# Altium PCB PCB.PcbDoc (part 2 of 2)
Units mm, origin at the board's own origin, x right, y up, seen from the top; angles counter-clockwise.
Board outline 23.1 x 50.44 mm, 2 copper layers (Top Layer, Bottom Layer), stack 1.671 mm thick; 126 components, 44 nets, 357 pads, 87 vias.
Unrouted connection lines stored in the file: 3.
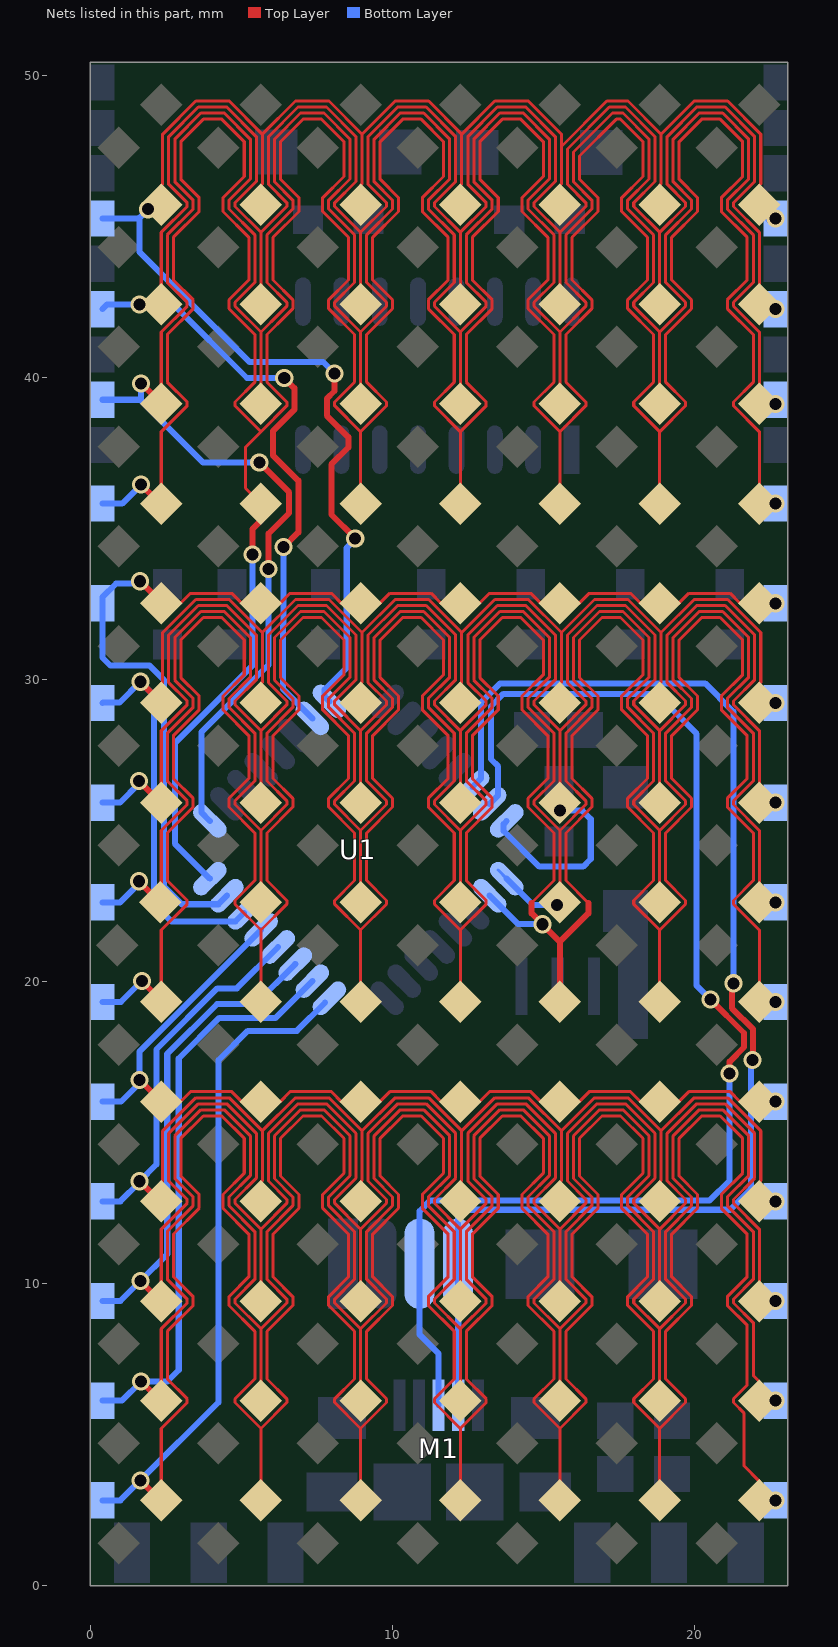
[diagram p2: the nets of this part, all layers, seen from the top]

## Via types
v1: diameter 0.6, hole 0.4, Top Layer to Bottom Layer, tented both sides, 86 vias
v2: diameter 0.6, hole 0.4, Top Layer to Bottom Layer, tented top, 1 vias

## Nets (pads, with @x,y where several pads share a name; then routed paths per layer and width w, separated by ;. In a path a pad name is that pad's centre, name@x,y a point inside that pad or via, vN(x,y) a via of type N, cw(c..) or ccw(c..) an arc to the next point about the centre after c; other vN are vias at no path point) (continued)
R2: D8.2 D9.2 D10.2 D11.2 D12.2 D13.2 D14.2 pad.@0.405,45.267 pad.@22.693,45.267 U1.24 | length 70.6
  Top Layer w0.1: D8.2@2.356,45.728 2.356,45.901 2.356,46.365 2.403,46.412 2.403,48.062 3.499,49.157 4.607,49.157 5.703,48.062 ; D9.2@5.656,45.728 5.656,46.365 5.703,46.412 ; D10.2@8.956,45.728 8.956,46.365 9.003,46.412 ; D11.2@12.256,45.728 12.256,46.365 12.303,46.412 ; D12.2@15.556,45.728 15.556,46.365 15.603,46.412 15.603,47.653 ; D13.2@18.856,45.728 18.856,46.365 18.903,46.412 18.903,48.062 ; D14.2@22.156,45.728 22.156,46.365 22.203,46.412 22.203,48.062 21.107,49.157 19.999,49.157 18.903,48.062 ; 5.703,46.412 5.703,48.062 ; 5.703,46.412 5.703,48.062 ; 5.703,48.062 6.799,49.157 7.907,49.157 9.003,48.062 ; 9.003,46.412 9.003,48.062 ; 9.003,46.412 9.003,48.062 ; 9.003,48.062 10.099,49.157 11.207,49.157 12.303,48.062 ; 12.303,46.412 12.303,48.062 ; 12.303,46.412 12.303,48.062 ; 12.303,48.062 13.399,49.157 14.507,49.157 15.603,48.062 15.603,47.653 ; 15.603,47.653 17.108,49.157 17.807,49.157 18.903,48.062
  Top Layer w0.2: v1(1.919,45.576) 1.919,45.601 2.218,45.901 D8.2@2.356,45.901 ; v1(8.091,40.14) 8.091,39.556 7.837,39.302 7.837,38.743 8.548,38.032 8.548,37.685 7.989,37.126 7.989,35.467 v1(8.777,34.679)
  Bottom Layer w0.2: pad.@0.405,45.267 1.61,45.267 1.639,45.297 ; v1(1.919,45.576) 1.639,45.297 ; U1.24@7.924,29.281 7.766,29.439 7.766,29.668 8.497,30.399 8.497,34.362 8.777,34.642 v1(8.777,34.679) ; v1(8.091,40.14) 7.71,40.521 5.271,40.521 1.639,44.154 1.639,45.297
  Bottom Layer w0.3: pad.@22.493,45.267 pad.@22.493,45.271
  other v1: 22.693,45.267
R3: D15.2 D16.2 D17.2 D18.2 D19.2 D20.2 D21.2 pad.@0.405,42.267 pad.@22.693,42.267 U1.23 | length 104.7
  Top Layer w0.1: D15.2@2.356,42.428 2.356,44.809 3.213,45.666 3.213,45.791 2.603,46.4 2.603,47.979 3.582,48.957 4.525,48.957 5.503,47.979 5.503,46.495 4.799,45.791 4.799,45.666 5.656,44.809 ; D16.2@5.656,42.428 5.656,44.809 ; D17.2@8.956,42.428 8.956,44.809 ; D18.2@12.256,42.428 12.256,44.809 ; D19.2@15.556,42.428 15.556,44.809 ; D20.2@18.856,42.428 18.856,44.809 ; D21.2@22.156,42.428 22.156,44.809 21.299,45.666 21.299,45.791 22.003,46.495 22.003,47.979 21.025,48.957 20.082,48.957 19.103,47.979 19.103,46.4 19.713,45.791 19.713,45.666 18.856,44.809 ; 5.656,44.809 6.513,45.666 6.513,45.791 5.903,46.4 5.903,47.979 6.882,48.957 7.825,48.957 8.803,47.979 8.803,46.495 8.099,45.791 8.099,45.666 8.956,44.809 ; 8.956,44.809 9.813,45.666 9.813,45.791 9.203,46.4 9.203,47.979 10.182,48.957 11.125,48.957 12.103,47.979 12.103,46.495 11.399,45.791 11.399,45.666 12.256,44.809 ; 12.256,44.809 13.113,45.666 13.113,45.791 12.503,46.4 12.503,47.979 13.482,48.957 14.425,48.957 15.403,47.979 15.403,46.495 14.699,45.791 14.699,45.666 15.556,44.809 ; 15.556,44.809 16.413,45.666 16.413,45.791 15.803,46.4 15.803,47.57 17.191,48.957 17.725,48.957 18.703,47.979 18.703,46.495 17.999,45.791 17.999,45.666 18.856,44.809
  Top Layer w0.2: v1(1.639,42.426) 2.354,42.426 D15.2@2.356,42.428 ; v1(6.406,34.392) 6.892,34.878 6.892,36.585 6.059,37.419 6.059,38.235 6.763,38.939 6.763,39.652 v1(6.427,39.988)
  Bottom Layer w0.2: pad.@0.405,42.267 0.564,42.426 v1(1.639,42.426) 2.757,42.426 5.196,39.988 v1(6.427,39.988) ; v1(6.406,34.392) 6.406,31.795 6.38,31.769 6.38,29.693 U1.23@7.358,28.716
  other v1: 22.693,42.267
R4: D22.2 D23.2 D24.2 D25.2 D26.2 D27.2 D28.2 pad.@0.405,39.267 pad.@22.693,39.267 U1.17 | length 148.6
  Top Layer w0.1: D22.2@2.356,39.145 2.356,41.509 3.213,42.366 3.213,42.491 2.556,43.148 2.556,44.726 3.413,45.583 3.413,45.873 2.803,46.483 2.803,47.896 3.665,48.757 4.442,48.757 5.303,47.896 5.303,46.578 4.599,45.873 4.599,45.583 5.456,44.726 5.456,43.148 4.799,42.491 4.799,42.366 5.656,41.509 ; D23.2@5.656,39.128 5.656,41.509 ; D24.2@8.956,39.128 8.956,41.509 ; D25.2@12.256,39.128 12.256,41.509 ; D26.2@15.556,39.128 15.556,41.509 ; D27.2@18.856,39.128 18.856,41.509 ; D28.2@22.156,39.128 22.156,41.509 21.299,42.366 21.299,42.491 21.956,43.148 21.956,44.726 21.099,45.583 21.099,45.873 21.803,46.578 21.803,47.896 20.942,48.757 20.165,48.757 19.303,47.896 19.303,46.483 19.913,45.873 19.913,45.583 19.056,44.726 19.056,43.148 19.713,42.491 19.713,42.366 18.856,41.509 ; 5.656,41.509 6.295,42.148 6.513,42.366 6.513,42.491 5.856,43.148 5.856,44.726 6.713,45.583 6.713,45.873 6.103,46.483 6.103,47.896 6.965,48.757 7.742,48.757 8.603,47.896 8.603,46.578 7.899,45.873 7.899,45.583 8.756,44.726 8.756,43.148 8.099,42.491 8.099,42.366 8.956,41.509 ; 8.956,41.509 9.813,42.366 9.813,42.491 9.156,43.148 9.156,44.726 10.013,45.583 10.013,45.873 9.403,46.483 9.403,47.896 10.265,48.757 11.042,48.757 11.903,47.896 11.903,46.578 11.199,45.873 11.199,45.583 12.056,44.726 12.056,43.148 11.399,42.491 11.399,42.366 12.256,41.509 ; 12.256,41.509 13.113,42.366 13.113,42.491 12.456,43.148 12.456,44.726 13.313,45.583 13.313,45.873 12.703,46.483 12.703,47.896 13.565,48.757 14.342,48.757 15.203,47.896 15.203,46.578 14.499,45.873 14.499,45.583 15.356,44.726 15.356,43.148 14.699,42.491 14.699,42.366 15.556,41.509 ; 15.556,41.509 16.413,42.366 16.413,42.491 15.756,43.148 15.756,44.726 16.613,45.583 16.613,45.873 16.003,46.483 16.003,47.469 17.292,48.757 17.642,48.757 18.503,47.896 18.503,46.578 17.799,45.873 17.799,45.583 18.656,44.726 18.656,43.148 17.999,42.491 17.999,42.366 18.856,41.509
  Top Layer w0.2: v1(1.69,39.81) 2.356,39.145 D22.2@2.356,39.128 ; v1(5.602,37.194) 6.592,36.203 6.592,35.518 5.906,34.832 v1(5.906,33.663)
  Bottom Layer w0.2: pad.@0.405,39.267 1.661,39.267 1.69,39.238 ; v1(1.69,39.81) 1.69,39.238 ; U1.17@3.964,25.322 3.681,25.605 3.681,28.263 5.906,30.488 v1(5.906,33.663) ; v1(5.602,37.194) 3.734,37.194 1.69,39.238
  other v1: 22.693,39.128
R5: D29.2 D30.2 D31.2 D32.2 D33.2 D34.2 D35.2 pad.@0.405,35.828 pad.@22.693,35.828 U1.16 | length 187.5
  Top Layer w0.1: D29.2@2.356,35.828 2.356,38.209 3.213,39.066 3.213,39.191 2.556,39.848 2.556,41.426 3.413,42.283 3.413,42.573 2.756,43.231 2.756,44.644 3.613,45.501 3.613,45.956 3.003,46.566 3.003,47.813 3.748,48.557 4.359,48.557 5.103,47.813 5.103,46.661 4.399,45.956 4.399,45.501 5.256,44.644 5.256,43.231 4.599,42.573 4.599,42.283 5.456,41.426 5.456,39.848 4.799,39.191 4.799,39.066 5.656,38.209 ; D30.2@5.656,35.828 5.144,36.34 5.144,37.698 5.656,38.209 ; D31.2@8.956,35.828 8.956,38.209 ; D32.2@12.256,35.828 12.256,38.209 ; D33.2@15.556,35.828 15.556,38.209 ; D34.2@18.856,35.828 18.856,38.209 ; D35.2@22.156,35.828 22.156,38.209 21.299,39.066 21.299,39.191 21.956,39.848 21.956,41.426 21.099,42.283 21.099,42.573 21.756,43.231 21.756,44.644 20.899,45.501 20.899,45.956 21.603,46.661 21.603,47.813 20.859,48.557 20.248,48.557 19.503,47.813 19.503,46.566 20.113,45.956 20.113,45.501 19.256,44.644 19.256,43.231 19.913,42.573 19.913,42.283 19.056,41.426 19.056,39.848 19.713,39.191 19.713,39.066 18.856,38.209 ; 5.656,38.209 6.513,39.066 6.513,39.191 5.856,39.848 5.856,41.426 6.512,42.083 6.713,42.283 6.713,42.573 6.056,43.231 6.056,44.644 6.913,45.501 6.913,45.956 6.303,46.566 6.303,47.813 7.048,48.557 7.659,48.557 8.403,47.813 8.403,46.661 7.699,45.956 7.699,45.501 8.556,44.644 8.556,43.231 7.899,42.573 7.899,42.283 8.756,41.426 8.756,39.848 8.099,39.191 8.099,39.066 8.956,38.209 ; 8.956,38.209 9.813,39.066 9.813,39.191 9.156,39.848 9.156,41.426 10.013,42.283 10.013,42.573 9.356,43.231 9.356,44.644 10.213,45.501 10.213,45.956 9.603,46.566 9.603,47.813 10.348,48.557 10.959,48.557 11.703,47.813 11.703,46.661 10.999,45.956 10.999,45.501 11.856,44.644 11.856,43.231 11.199,42.573 11.199,42.283 12.056,41.426 12.056,39.848 11.399,39.191 11.399,39.066 12.256,38.209 ; 12.256,38.209 13.113,39.066 13.113,39.191 12.456,39.848 12.456,41.426 13.313,42.283 13.313,42.573 12.656,43.231 12.656,44.644 13.513,45.501 13.513,45.956 12.903,46.566 12.903,47.813 13.648,48.557 14.259,48.557 15.003,47.813 15.003,46.661 14.299,45.956 14.299,45.501 15.156,44.644 15.156,43.231 14.499,42.573 14.499,42.283 15.356,41.426 15.356,39.848 14.699,39.191 14.699,39.066 15.556,38.209 ; 15.556,38.209 16.413,39.066 16.413,39.191 15.756,39.848 15.756,41.426 16.613,42.283 16.613,42.573 15.956,43.231 15.956,44.644 16.813,45.501 16.813,45.956 16.203,46.566 16.203,47.338 17.422,48.557 17.559,48.557 18.303,47.813 18.303,46.661 17.599,45.956 17.599,45.501 18.456,44.644 18.456,43.231 17.799,42.573 17.799,42.283 18.656,41.426 18.656,39.848 17.999,39.191 17.999,39.066 18.856,38.209
  Top Layer w0.2: v1(1.69,36.457) 2.319,35.828 D29.2@2.356,35.828 ; v1(5.373,34.146) 5.373,34.98 5.656,35.263 D30.2@5.656,35.828
  Bottom Layer w0.2: pad.@0.405,35.828 1.061,35.828 v1(1.69,36.457) ; U1.16@3.964,23.412 2.808,24.569 2.808,27.898 5.373,30.463 v1(5.373,34.146)
  other v1: 22.693,35.828
R6: D36.2 D37.2 D38.2 D39.2 D40.2 D41.2 D42.2 pad.@0.405,32.528 pad.@22.693,32.528 U1.15 | length 36.9
  Top Layer w0.1: D36.2@2.356,32.528 2.992,32.528 3.321,32.857 4.69,32.857 5.019,32.528 D37.2@5.656,32.528 6.292,32.528 6.621,32.857 7.99,32.857 8.319,32.528 9.592,32.528 9.921,32.857 11.29,32.857 11.619,32.528 D39.2@12.256,32.528 12.892,32.528 13.221,32.857 14.59,32.857 14.919,32.528 D40.2@15.556,32.528 16.192,32.528 16.521,32.857 17.89,32.857 D41.2@18.219,32.528 ; D41.2@18.856,32.528 19.492,32.528 19.821,32.857 21.19,32.857 21.519,32.528 D42.2@22.156,32.528
  Top Layer w0.2: v1(1.656,33.257) 2.356,32.557 D36.2@2.356,32.528
  Bottom Layer w0.2: v1(1.656,33.257) 1.579,33.181 0.857,33.181 0.405,32.728 0.405,30.733 0.674,30.463 1.969,30.463 2.452,29.98 2.452,23.148 3.036,22.564 4.247,22.564 U1.15@4.53,22.847
  other v1: 22.693,32.528
R7: D43.2 D44.2 D45.2 D46.2 D47.2 D48.2 D49.2 pad.@0.405,29.228 pad.@22.693,29.228 U1.14 | length 64.7
  Top Layer w0.1: D43.2@2.356,29.228 2.356,29.865 2.403,29.912 2.403,31.562 3.499,32.657 4.607,32.657 5.703,31.562 ; D48.2@18.856,29.228 18.856,29.865 18.903,29.912 18.903,31.562 ; D49.2@22.156,29.228 22.156,29.865 22.203,29.912 22.203,31.562 21.107,32.657 19.999,32.657 18.903,31.562 ; D44.2@5.656,29.865 5.703,29.912 ; D44.2@5.656,29.865 D44.2@5.656,29.228 D44.2@5.656,29.865 ; D44.2@5.656,29.865 5.703,29.912 ; 5.703,29.912 5.703,31.562 ; 5.703,29.912 5.703,31.562 ; 5.703,31.562 6.799,32.657 7.907,32.657 9.003,31.562 ; D45.2@8.956,29.865 D45.2@8.956,29.228 D45.2@8.956,29.865 ; D45.2@8.956,29.865 9.003,29.912 ; D45.2@8.956,29.865 9.003,29.912 ; 9.003,29.912 9.003,31.562 ; 9.003,29.912 9.003,31.562 ; 9.003,31.562 10.099,32.657 11.207,32.657 12.303,31.562 ; D46.2@12.256,29.865 D46.2@12.256,29.228 D46.2@12.256,29.865 ; D46.2@12.256,29.865 12.303,29.912 ; D46.2@12.256,29.865 12.303,29.912 ; 12.303,29.912 12.303,31.562 ; 12.303,29.912 12.303,31.562 ; 12.303,31.562 13.399,32.657 14.507,32.657 15.603,31.562 ; D47.2@15.556,29.865 D47.2@15.556,29.228 D47.2@15.556,29.865 ; D47.2@15.556,29.865 15.603,29.912 ; D47.2@15.556,29.865 15.603,29.912 ; 15.603,29.912 15.603,31.562 ; 15.603,29.912 15.603,31.562 ; 15.603,31.562 16.699,32.657 17.807,32.657 18.903,31.562
  Top Layer w0.2: v1(1.665,29.93) D43.2@2.356,29.239 ; D49.2@22.156,29.228 D49.2@22.156,29.364
  Top Layer w0.3: D43.2@2.356,29.228 D43.2@2.356,29.239
  Bottom Layer w0.2: pad.@0.405,29.228 0.42,29.244 0.979,29.244 v1(1.665,29.93) 2.122,29.472 2.122,22.564 2.687,21.998 4.812,21.998 U1.14@5.095,22.281
  other v1: 22.693,29.228
R8: D50.2 D51.2 D52.2 D53.2 D54.2 D55.2 D56.2 pad.@0.405,25.928 pad.@22.693,25.928 U1.32 | length 93.7
  Top Layer w0.1: D50.2@2.356,25.928 2.356,28.309 3.213,29.166 3.213,29.291 2.603,29.9 2.603,31.479 3.582,32.457 4.525,32.457 5.503,31.479 5.503,29.995 4.799,29.291 4.799,29.166 5.656,28.309 ; D51.2@5.656,25.928 5.656,28.309 ; D52.2@8.956,25.928 8.956,28.309 ; D53.2@12.256,25.928 12.256,28.309 ; v1(15.558,25.662) 15.558,25.926 D54.2@15.556,25.928 15.556,26.636 15.556,28.309 ; D55.2@18.856,25.928 18.856,28.309 ; D56.2@22.156,25.928 22.156,28.309 21.299,29.166 21.299,29.291 22.003,29.995 22.003,31.479 21.025,32.457 20.082,32.457 19.103,31.479 19.103,29.9 19.713,29.291 19.713,29.166 18.856,28.309 ; 5.656,28.309 6.513,29.166 6.513,29.291 5.903,29.9 5.903,31.479 6.882,32.457 7.825,32.457 8.803,31.479 8.803,29.995 8.099,29.291 8.099,29.166 8.956,28.309 ; 8.956,28.309 9.813,29.166 9.813,29.291 9.203,29.9 9.203,31.479 10.182,32.457 11.125,32.457 12.103,31.479 12.103,29.995 11.399,29.291 11.399,29.166 12.256,28.309 ; 12.256,28.309 13.113,29.166 13.113,29.291 12.503,29.9 12.503,31.479 13.482,32.457 14.425,32.457 15.403,31.479 15.403,29.995 14.699,29.291 14.699,29.166 15.556,28.309 ; 15.556,28.309 16.413,29.166 16.413,29.291 15.803,29.9 15.803,31.479 16.782,32.457 17.725,32.457 18.703,31.479 18.703,29.995 17.999,29.291 17.999,29.166 18.856,28.309
  Top Layer w0.2: v1(1.616,26.651) 2.339,25.928 D50.2@2.356,25.928
  Bottom Layer w0.2: pad.@0.405,25.928 0.991,25.928 1.616,26.554 v1(1.616,26.651) ; U1.32@13.793,25.322 13.69,25.219 13.69,24.991 14.873,23.808 16.32,23.808 16.574,24.062 16.574,25.383 16.295,25.662 v1(15.558,25.662)
  other v1: 22.693,25.928
R9: D57.2 D58.2 D59.2 D60.2 D61.2 D62.2 D63.2 pad.@0.405,22.628 pad.@22.693,22.628 U1.1 | length 132.7
  Top Layer w0.1: D57.2@2.356,22.628 2.356,25.009 3.213,25.866 3.213,25.991 2.556,26.648 2.556,28.226 3.413,29.083 3.413,29.373 2.803,29.983 2.803,31.396 3.665,32.257 4.442,32.257 5.303,31.396 5.303,30.078 4.599,29.373 4.599,29.083 5.456,28.226 5.456,26.648 4.799,25.991 4.799,25.866 5.656,25.009 ; D58.2@5.656,22.628 5.656,25.009 ; D59.2@8.956,22.628 8.956,25.009 ; D60.2@12.256,22.628 12.256,25.009 ; v1(15.457,22.538) 15.466,22.538 D61.2@15.556,22.628 15.556,23.265 15.556,25.009 ; D62.2@18.856,22.628 18.856,25.009 ; D63.2@22.156,22.628 22.156,25.009 21.299,25.866 21.299,25.991 21.956,26.648 21.956,28.226 21.099,29.083 21.099,29.373 21.803,30.078 21.803,31.396 20.942,32.257 20.165,32.257 19.303,31.396 19.303,29.983 19.913,29.373 19.913,29.083 19.056,28.226 19.056,26.648 19.713,25.991 19.713,25.866 18.856,25.009 ; 5.656,25.009 6.513,25.866 6.513,25.991 5.856,26.648 5.856,28.226 6.713,29.083 6.713,29.373 6.103,29.983 6.103,31.396 6.965,32.257 7.742,32.257 8.603,31.396 8.603,30.078 7.899,29.373 7.899,29.083 8.756,28.226 8.756,26.648 8.099,25.991 8.099,25.866 8.956,25.009 ; 8.956,25.009 9.813,25.866 9.813,25.991 9.156,26.648 9.156,28.226 10.013,29.083 10.013,29.373 9.403,29.983 9.403,31.396 10.265,32.257 11.042,32.257 11.903,31.396 11.903,30.078 11.199,29.373 11.199,29.083 12.056,28.226 12.056,26.648 11.399,25.991 11.399,25.866 12.256,25.009 ; 12.256,25.009 13.113,25.866 13.113,25.991 12.456,26.648 12.456,28.226 13.313,29.083 13.313,29.373 12.703,29.983 12.703,31.396 13.565,32.257 14.342,32.257 15.203,31.396 15.203,30.078 14.499,29.373 14.499,29.083 15.356,28.226 15.356,26.648 14.699,25.991 14.699,25.866 15.556,25.009 ; 15.556,25.009 16.413,25.866 16.413,25.991 15.756,26.648 15.756,28.226 16.613,29.083 16.613,29.373 16.003,29.983 16.003,31.396 16.865,32.257 17.642,32.257 18.503,31.396 18.503,30.078 17.799,29.373 17.799,29.083 18.656,28.226 18.656,26.648 17.999,25.991 17.999,25.866 18.856,25.009
  Top Layer w0.2: v1(1.614,23.326) 2.311,22.628 D57.2@2.317,22.628
  Bottom Layer w0.1: U1.1@13.51,23.695 U1.1@13.793,23.412
  Bottom Layer w0.2: pad.@0.405,22.628 0.993,22.628 1.614,23.249 v1(1.614,23.326) ; U1.1@13.793,23.412 14.667,22.538 v1(15.457,22.538)
  other v1: 22.693,22.628
R10: D64.2 D65.2 D66.2 D67.2 D68.2 D69.2 D70.2 pad.@0.405,19.328 pad.@22.693,19.328 U1.2 | length 176
  Top Layer w0.1: D64.2@2.356,19.383 2.356,21.709 3.213,22.566 3.213,22.691 2.556,23.348 2.556,24.926 3.413,25.783 3.413,26.073 2.756,26.731 2.756,28.144 3.613,29.001 3.613,29.456 3.003,30.066 3.003,31.313 3.748,32.057 4.359,32.057 5.103,31.313 5.103,30.161 4.399,29.456 4.399,29.001 5.256,28.144 5.256,26.731 4.599,26.073 4.599,25.783 5.456,24.926 5.456,23.348 4.799,22.691 4.799,22.566 5.656,21.709 ; D65.2@5.656,19.328 5.656,21.709 ; D66.2@8.956,19.328 8.956,21.709 ; D67.2@12.256,19.328 12.256,21.709 ; 14.617,22.609 15.356,23.348 15.356,24.926 14.499,25.783 14.499,26.073 15.156,26.731 15.156,28.144 14.299,29.001 14.299,29.456 15.003,30.161 15.003,31.313 14.259,32.057 13.648,32.057 12.903,31.313 12.903,30.066 13.513,29.456 13.513,29.001 12.656,28.144 12.656,26.731 13.313,26.073 13.313,25.783 12.456,24.926 12.456,23.348 13.113,22.691 13.113,22.566 12.256,21.709 ; 16.495,22.609 15.756,23.348 15.756,24.926 16.613,25.783 16.613,26.073 15.956,26.731 15.956,28.144 16.813,29.001 16.813,29.456 16.203,30.066 16.203,31.313 16.948,32.057 17.559,32.057 18.303,31.313 18.303,30.161 17.599,29.456 17.599,29.001 18.456,28.144 18.456,26.731 17.799,26.073 17.799,25.783 18.656,24.926 18.656,23.348 17.999,22.691 17.999,22.566 18.856,21.709 ; D69.2@18.856,19.328 18.856,21.709 ; D70.2@22.156,19.328 22.156,21.709 21.299,22.566 21.299,22.691 21.956,23.348 21.956,24.926 21.099,25.783 21.099,26.073 21.756,26.731 21.756,28.144 20.899,29.001 20.899,29.456 21.603,30.161 21.603,31.313 20.859,32.057 20.248,32.057 19.503,31.313 19.503,30.066 20.113,29.456 20.113,29.001 19.256,28.144 19.256,26.731 19.913,26.073 19.913,25.783 19.056,24.926 19.056,23.348 19.713,22.691 19.713,22.566 18.856,21.709 ; 5.656,21.709 6.513,22.566 6.513,22.691 5.856,23.348 5.856,24.926 6.713,25.783 6.713,26.073 6.056,26.731 6.056,28.144 6.913,29.001 6.913,29.456 6.303,30.066 6.303,31.313 7.048,32.057 7.659,32.057 8.403,31.313 8.403,30.161 7.699,29.456 7.699,29.001 8.556,28.144 8.556,26.731 7.899,26.073 7.899,25.783 8.756,24.926 8.756,23.348 8.099,22.691 8.099,22.566 8.956,21.709 ; 8.956,21.709 9.813,22.566 9.813,22.691 9.156,23.348 9.156,24.926 10.013,25.783 10.013,26.073 9.356,26.731 9.356,28.144 10.213,29.001 10.213,29.456 9.603,30.066 9.603,31.313 10.348,32.057 10.959,32.057 11.703,31.313 11.703,30.161 10.999,29.456 10.999,29.001 11.856,28.144 11.856,26.731 11.199,26.073 11.199,25.783 12.056,24.926 12.056,23.348 11.399,22.691 11.399,22.566 12.256,21.709
  Top Layer w0.2: v1(1.715,20.024) 2.356,19.383 D64.2@2.356,19.328 ; 14.617,22.609 14.617,22.261 v1(14.974,21.903) 15.556,21.322 ; D68.2@15.556,19.328 15.556,21.322 ; 16.495,22.609 16.495,22.261 15.556,21.322
  Bottom Layer w0.2: pad.@0.405,19.328 1.02,19.328 v1(1.715,20.024) ; U1.2@13.227,22.847 14.171,21.903 v1(14.974,21.903)
  other v1: 22.693,19.328
R11: D71.2 D72.2 D73.2 D74.2 D75.2 D76.2 D77.2 pad.@0.405,16.028 pad.@22.693,16.028 U1.13 | length 30.8
  Top Layer w0.1: D71.2@2.356,16.028 2.992,16.028 3.321,16.357 4.69,16.357 5.019,16.028 D72.2@5.656,16.028 6.292,16.028 6.621,16.357 7.99,16.357 8.319,16.028 9.592,16.028 9.921,16.357 11.29,16.357 11.619,16.028 D74.2@12.256,16.028 12.892,16.028 13.221,16.357 14.59,16.357 14.919,16.028 D75.2@15.556,16.028 16.192,16.028 16.521,16.357 17.89,16.357 18.219,16.028 19.492,16.028 19.821,16.357 21.19,16.357 21.519,16.028 D77.2@22.156,16.028
  Top Layer w0.2: v1(1.639,16.747) 2.356,16.031 D71.2@2.356,16.028 ; D77.2@22.156,16.028 D77.2@22.246,16.028
  Bottom Layer w0.2: pad.@0.405,16.028 1.022,16.028 1.639,16.645 v1(1.639,16.747) 1.639,17.694 U1.13@5.661,21.715
  other v1: 22.693,16.028
R12: D78.2 D79.2 D80.2 D81.2 D82.2 D83.2 D84.2 pad.@0.405,12.728 pad.@22.693,12.728 U1.12 | length 63.7
  Top Layer w0.1: D78.2@2.356,12.728 2.356,13.365 2.403,13.412 2.403,15.062 3.499,16.157 4.607,16.157 5.703,15.062 ; D83.2@18.856,12.728 18.856,13.365 18.903,13.412 18.903,15.062 ; D84.2@22.156,12.728 22.156,13.365 22.203,13.412 22.203,15.062 21.107,16.157 19.999,16.157 18.903,15.062 ; D79.2@5.656,13.365 5.703,13.412 ; D79.2@5.656,13.365 D79.2@5.656,12.728 D79.2@5.656,13.365 ; D79.2@5.656,13.365 5.703,13.412 ; 5.703,13.412 5.703,15.062 ; 5.703,13.412 5.703,15.062 ; 5.703,15.062 6.799,16.157 7.907,16.157 9.003,15.062 ; D80.2@8.956,13.365 D80.2@8.956,12.728 D80.2@8.956,13.365 ; D80.2@8.956,13.365 9.003,13.412 ; D80.2@8.956,13.365 9.003,13.412 ; 9.003,13.412 9.003,15.062 ; 9.003,13.412 9.003,15.062 ; 9.003,15.062 10.099,16.157 11.207,16.157 12.303,15.062 ; D81.2@12.256,13.365 D81.2@12.256,12.728 D81.2@12.256,13.365 ; D81.2@12.256,13.365 12.303,13.412 ; D81.2@12.256,13.365 12.303,13.412 ; 12.303,13.412 12.303,15.062 ; 12.303,13.412 12.303,15.062 ; 12.303,15.062 13.399,16.157 14.507,16.157 15.603,15.062 ; D82.2@15.556,13.365 D82.2@15.556,12.728 D82.2@15.556,13.365 ; D82.2@15.556,13.365 15.603,13.412 ; D82.2@15.556,13.365 15.603,13.412 ; 15.603,13.412 15.603,15.062 ; 15.603,13.412 15.603,15.062 ; 15.603,15.062 16.699,16.157 17.807,16.157 18.903,15.062
  Top Layer w0.2: v1(1.639,13.394) 2.305,12.728 D78.2@2.356,12.728
  Bottom Layer w0.2: pad.@0.405,12.728 0.999,12.728 1.639,13.369 v1(1.639,13.394) 2.198,13.953 2.198,17.763 4.213,19.778 4.855,19.778 U1.12@6.227,21.15
  other v1: 22.693,12.728
R13: D85.2 D86.2 D87.2 D88.2 D89.2 D90.2 D91.2 pad.@0.405,9.428 pad.@22.693,9.428 U1.11 | length 100.3
  Top Layer w0.1: D85.2@2.356,9.428 2.356,11.809 3.213,12.666 3.213,12.791 2.603,13.4 2.603,14.979 3.582,15.957 4.525,15.957 5.503,14.979 5.503,13.495 4.799,12.791 4.799,12.666 5.656,11.809 ; D86.2@5.656,9.428 5.656,11.809 ; D87.2@8.956,9.428 8.956,11.809 ; D88.2@12.256,9.428 12.256,11.809 ; D89.2@15.556,9.428 15.556,11.809 ; D90.2@18.856,9.428 18.856,11.809 ; D91.2@22.156,9.428 22.156,11.809 21.299,12.666 21.299,12.791 22.003,13.495 22.003,14.979 21.025,15.957 20.082,15.957 19.103,14.979 19.103,13.4 19.713,12.791 19.713,12.666 18.856,11.809 ; 5.656,11.809 6.513,12.666 6.513,12.791 5.903,13.4 5.903,14.979 6.882,15.957 7.825,15.957 8.803,14.979 8.803,13.495 8.099,12.791 8.099,12.666 8.956,11.809 ; 8.956,11.809 9.813,12.666 9.813,12.791 9.203,13.4 9.203,14.979 10.182,15.957 11.125,15.957 12.103,14.979 12.103,13.495 11.399,12.791 11.399,12.666 12.256,11.809 ; 12.256,11.809 13.113,12.666 13.113,12.791 12.503,13.4 12.503,14.979 13.482,15.957 14.425,15.957 15.403,14.979 15.403,13.495 14.699,12.791 14.699,12.666 15.556,11.809 ; 15.556,11.809 16.413,12.666 16.413,12.791 15.803,13.4 15.803,14.979 16.782,15.957 17.725,15.957 18.703,14.979 18.703,13.495 17.999,12.791 17.999,12.666 18.856,11.809
  Top Layer w0.2: v1(1.665,10.092) 2.329,9.428 D85.2@2.356,9.428
  Bottom Layer w0.2: pad.@0.405,9.428 1.001,9.428 v1(1.665,10.092) 2.554,10.981 2.554,17.611 4.205,19.262 5.47,19.262 U1.11@6.792,20.584
  other v1: 22.693,9.428
R14: D92.2 D93.2 D94.2 D95.2 D96.2 D97.2 D98.2 pad.@0.405,6.128 pad.@22.693,6.128 U1.10 | length 147.3
  Top Layer w0.1: D92.2@2.356,6.128 2.356,8.509 3.213,9.366 3.213,9.491 2.558,10.145 2.558,11.729 3.413,12.583 3.413,12.873 2.803,13.483 2.803,14.896 3.665,15.757 4.442,15.757 5.303,14.896 5.303,13.578 4.599,12.873 4.599,12.583 5.456,11.726 5.456,10.148 4.799,9.491 4.799,9.366 5.656,8.509 ; D93.2@5.656,6.128 5.656,8.509 ; D94.2@8.956,6.128 8.956,8.509 ; D95.2@12.256,6.128 12.256,8.509 ; D96.2@15.556,6.128 15.556,8.509 ; D97.2@18.856,6.128 18.856,8.509 ; D98.2@22.156,6.128 22.156,6.761 21.956,6.961 21.956,8.709 21.299,9.366 21.299,9.491 21.956,10.148 21.956,11.726 21.099,12.583 21.099,12.873 21.803,13.578 21.803,14.896 20.942,15.757 20.165,15.757 19.303,14.896 19.303,13.483 19.913,12.873 19.913,12.583 19.056,11.726 19.056,10.148 19.713,9.491 19.713,9.366 18.856,8.509 ; 5.656,8.509 6.513,9.366 6.513,9.491 5.856,10.148 5.856,11.726 6.713,12.583 6.713,12.873 6.103,13.483 6.103,14.896 6.965,15.757 7.742,15.757 8.603,14.896 8.603,13.578 7.899,12.873 7.899,12.583 8.756,11.726 8.756,10.148 8.099,9.491 8.099,9.366 8.956,8.509 ; 8.956,8.509 9.813,9.366 9.813,9.491 9.156,10.148 9.156,11.726 10.013,12.583 10.013,12.873 9.403,13.483 9.403,14.896 10.265,15.757 11.042,15.757 11.903,14.896 11.903,13.578 11.199,12.873 11.199,12.583 12.056,11.726 12.056,10.148 11.399,9.491 11.399,9.366 12.256,8.509 ; 12.256,8.509 13.113,9.366 13.113,9.491 12.456,10.148 12.456,11.726 13.313,12.583 13.313,12.873 12.703,13.483 12.703,14.896 13.565,15.757 14.342,15.757 15.203,14.896 15.203,13.578 14.499,12.873 14.499,12.583 15.356,11.726 15.356,10.148 14.699,9.491 14.699,9.366 15.556,8.509 ; 15.556,8.509 16.413,9.366 16.413,9.491 15.756,10.148 15.756,11.726 16.613,12.583 16.613,12.873 16.003,13.483 16.003,14.896 16.865,15.757 17.642,15.757 18.503,14.896 18.503,13.578 17.799,12.873 17.799,12.583 18.656,11.726 18.656,10.148 17.999,9.491 17.999,9.366 18.856,8.509
  Top Layer w0.2: v1(1.69,6.765) 2.327,6.128 D92.2@2.352,6.128
  Top Layer w0.3: D92.2@2.352,6.128 D92.2@2.356,6.128
  Bottom Layer w0.2: pad.@0.405,6.128 1.054,6.128 v1(1.69,6.765) 2.554,6.765 2.935,7.146 2.935,17.458 4.281,18.804 6.144,18.804 U1.10@7.358,20.018
  other v1: 22.693,6.128
R15: D99.2 D100.2 D101.2 D102.2 D103.2 D104.2 D105.2 pad.@0.405,2.828 pad.@22.693,2.828 U1.9 | length 192.4
  Top Layer w0.1: D99.2@2.356,2.828 2.356,5.209 3.213,6.066 3.213,6.191 2.556,6.848 2.556,8.426 3.413,9.283 3.413,9.573 2.758,10.228 2.758,11.646 3.613,12.501 3.613,12.956 3.003,13.566 3.003,14.813 3.748,15.557 4.359,15.557 5.103,14.813 5.103,13.661 4.399,12.956 4.399,12.501 5.256,11.644 5.256,10.231 4.599,9.573 4.599,9.283 5.456,8.426 5.456,6.848 4.799,6.191 4.799,6.066 5.656,5.209 ; D100.2@5.656,2.828 5.656,5.209 ; D101.2@8.956,2.828 8.956,3.736 8.956,5.209 ; D102.2@12.256,2.828 12.256,5.209 ; D103.2@15.556,2.828 15.556,3.736 15.556,5.209 ; D104.2@18.856,2.828 18.856,5.209 ; D105.2@22.156,2.828 22.156,3.465 21.654,3.966 21.654,5.71 21.299,6.066 21.299,6.191 21.756,6.648 21.756,8.626 21.099,9.283 21.099,9.573 21.756,10.231 21.756,11.644 20.899,12.501 20.899,12.956 21.603,13.661 21.603,14.813 20.859,15.557 20.248,15.557 19.503,14.813 19.503,13.566 20.113,12.956 20.113,12.501 19.256,11.644 19.256,10.231 19.913,9.573 19.913,9.283 19.056,8.426 19.056,6.848 19.713,6.191 19.713,6.066 18.856,5.209 ; 5.656,5.209 6.513,6.066 6.513,6.191 5.856,6.848 5.856,8.426 6.713,9.283 6.713,9.573 6.056,10.231 6.056,11.644 6.913,12.501 6.913,12.956 6.303,13.566 6.303,14.813 7.048,15.557 7.659,15.557 8.403,14.813 8.403,13.661 7.699,12.956 7.699,12.501 8.556,11.644 8.556,10.231 7.899,9.573 7.899,9.283 8.756,8.426 8.756,6.848 8.099,6.191 8.099,6.066 8.956,5.209 ; 8.956,5.209 9.813,6.066 9.813,6.191 9.156,6.848 9.156,8.426 10.013,9.283 10.013,9.573 9.356,10.231 9.356,11.644 10.213,12.501 10.213,12.956 9.603,13.566 9.603,14.813 10.348,15.557 10.959,15.557 11.703,14.813 11.703,13.661 10.999,12.956 10.999,12.501 11.856,11.644 11.856,10.231 11.199,9.573 11.199,9.283 12.056,8.426 12.056,6.848 11.399,6.191 11.399,6.066 12.256,5.209 ; 12.256,5.209 13.113,6.066 13.113,6.191 12.456,6.848 12.456,8.426 13.313,9.283 13.313,9.573 12.656,10.231 12.656,11.644 13.513,12.501 13.513,12.956 12.903,13.566 12.903,14.813 13.648,15.557 14.259,15.557 15.003,14.813 15.003,13.661 14.299,12.956 14.299,12.501 15.156,11.644 15.156,10.231 14.499,9.573 14.499,9.283 15.356,8.426 15.356,6.848 14.699,6.191 14.699,6.066 15.556,5.209 ; 15.556,5.209 16.413,6.066 16.413,6.191 15.756,6.848 15.756,8.426 16.613,9.283 16.613,9.573 15.956,10.231 15.956,11.644 16.813,12.501 16.813,12.956 16.203,13.566 16.203,14.813 16.948,15.557 17.559,15.557 18.303,14.813 18.303,13.661 17.599,12.956 17.599,12.501 18.456,11.644 18.456,10.231 17.799,9.573 17.799,9.283 18.656,8.426 18.656,6.848 17.999,6.191 17.999,6.066 18.856,5.209
  Top Layer w0.2: v1(1.665,3.488) D99.2@2.325,2.828
  Top Layer w0.3: D99.2@2.325,2.828 D99.2@2.356,2.828
  Bottom Layer w0.2: pad.@0.405,2.828 1.005,2.828 v1(1.665,3.488) 4.251,6.075 4.251,17.403 5.221,18.373 6.844,18.373 U1.9@7.782,19.311
  other v1: 22.693,2.828
RX: M1.3 pad.@10.91,10.665 U1.31 | length 44
  Top Layer w0.2: v1(20.537,19.414) 21.649,18.302 21.649,17.831 21.172,17.355 v1(21.172,16.959)
  Bottom Layer w0.2: M1.3@11.539,5.982 11.539,7.685 11.164,8.06 10.91,8.314 pad.@10.91,10.665 10.91,12.403 11.266,12.759 20.511,12.759 21.172,13.42 v1(21.172,16.959) ; U1.31@13.227,25.887 13.51,26.17 13.51,27.13 13.272,27.368 13.272,29.118 13.684,29.529 18.753,29.529 20.08,28.202 20.08,19.871 v1(20.537,19.414)
TX: M1.2 pad.@12.18,10.665 U1.30 | length 44.5
  Top Layer w0.2: v1(21.299,19.947) 21.249,19.897 21.249,19.127 21.949,18.427 21.949,17.424 v1(21.933,17.409)
  Bottom Layer w0.2: pad.@12.18,10.665 12.18,12.358 12.272,12.45 21.192,12.45 21.883,13.14 21.883,17.359 v1(21.933,17.409) ; M1.2@12.189,5.982 pad.@12.189,10.665 ; U1.30@12.661,26.453 12.944,26.736 12.944,29.246 13.577,29.879 20.359,29.879 21.299,28.939 v1(21.299,19.947)
pads on no net: M1.4 U2.15

## Polygon pours and split planes (outlines as drawn)
no net on Top Layer "NONET_L01_P000" (solid, pour order 0): 0,0 0,50.443 23.097,50.443 23.097,0
no net on Bottom Layer "NONET_L02_P001" (solid, pour order 1): 0,0 0,50.443 23.097,50.443 23.097,0

## Keep-outs
Keep-Out Layer:
  the board outline again, w0.1

## Other copper
Bottom Layer:
  pour cut-out: 13.501,12.048 20.232,12.048 20.232,9.254 13.501,9.254
  pour cut-out: 15.539,0.157 15.539,7.654 7.539,7.654 7.539,0.157

## Silkscreen, mask and mechanical layers (free items; w line width, h text height)
Bottom Overlay:
  lines w0.1: 4.078,46.897 4.814,46.897 ; 4.103,43.9 4.814,43.9 ; 4.179,49.894 4.814,49.894 4.814,43.442
  text "to C" at 4.052,49.157 h0.8
  text "to B" at 3.976,46.16 h0.8
  text "A" at 10.047,43.315 h0.8
  text "C" at 13.882,43.315 h0.8
  text "B" at 11.291,43.29 h0.8
  text "to A" at 4.027,43.163 h0.8
  text "Expanded board" at 2.528,36.711 h0.8 r270
  text "ELEC CHANNEL" at 16.397,15.198 h0.8
  text "TX" at 11.52,13.801 h0.8 r90
  text "RX" at 12.815,13.801 h0.8 r90